# Altium PCB PCB1.PcbDoc (part 2 of 3)
Units mm, origin at the board's own origin, x right, y up, seen from the top; angles counter-clockwise.
Board outline 72 x 48 mm, 6 copper layers (SIG1, GND1, SIG2, PWR, GND2, SIG3), stack 0.816 mm thick; 134 components, 203 nets, 720 pads, 397 vias.
Unrouted connection lines stored in the file: 1.
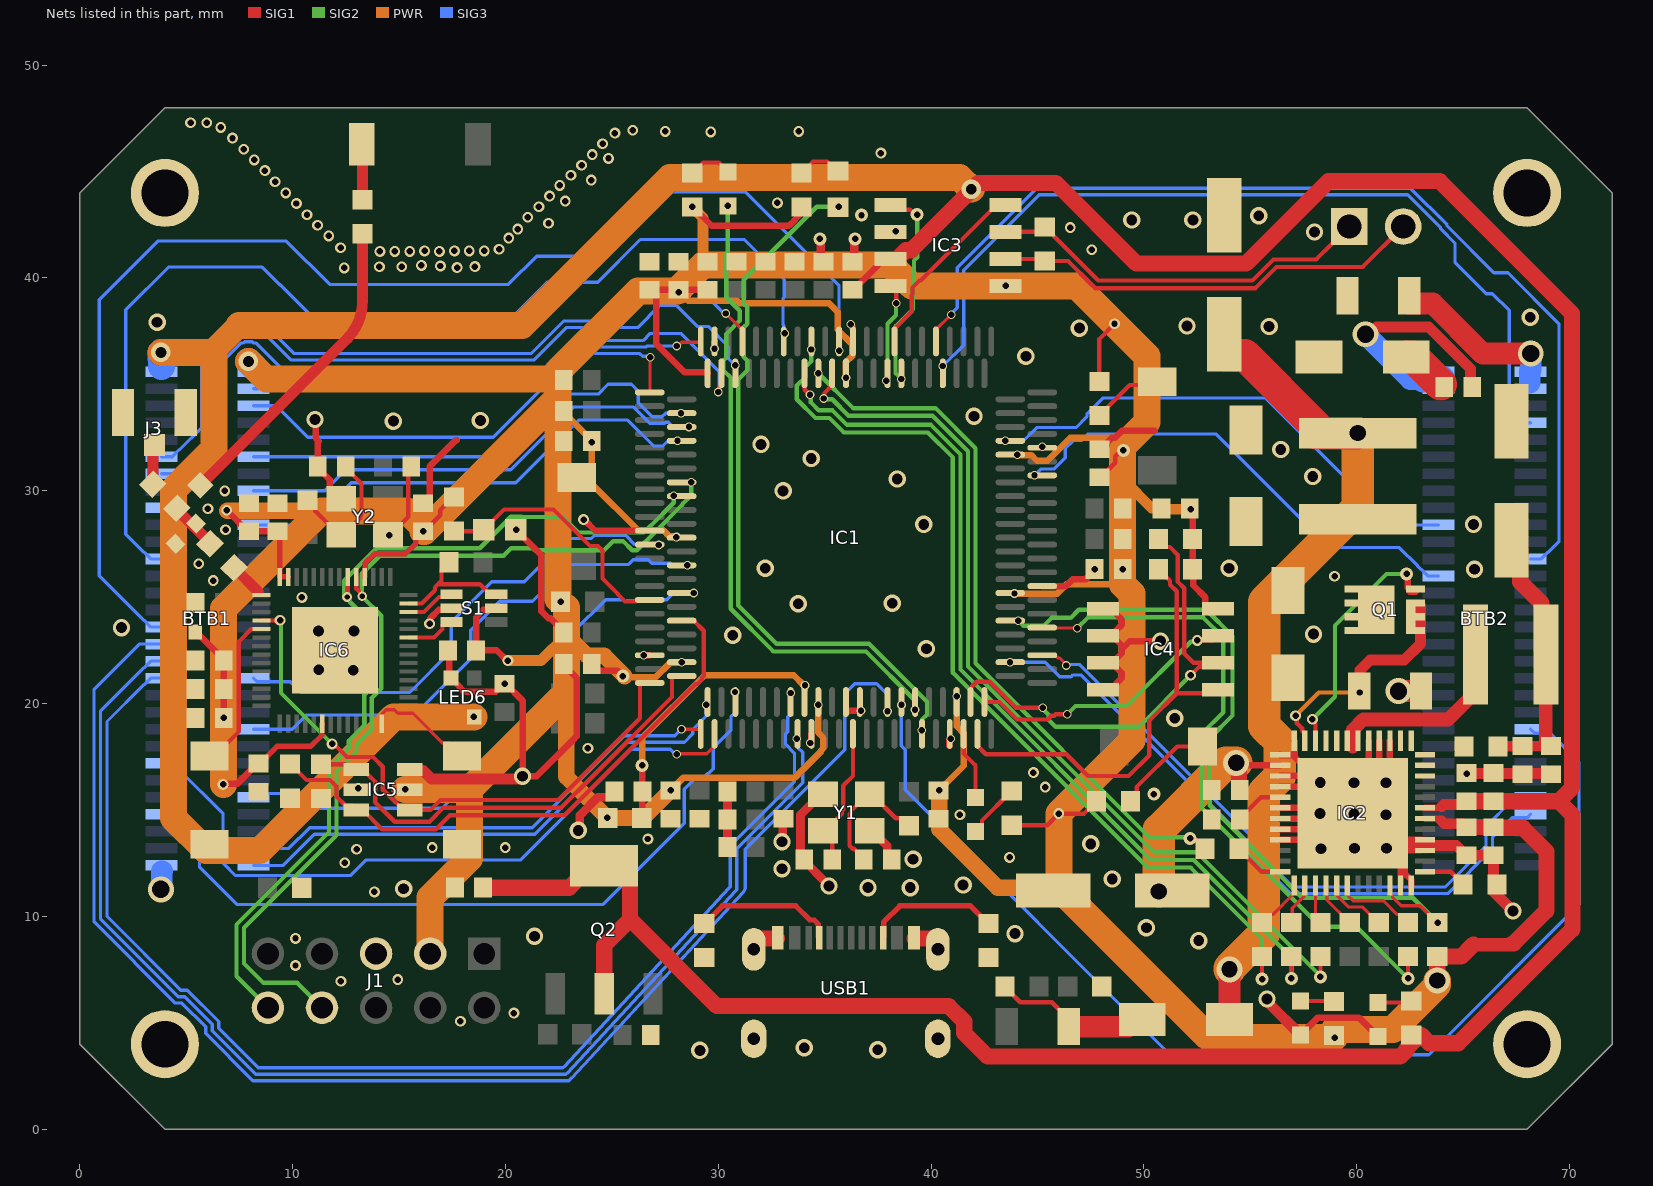
[diagram p6: the nets of this part, all layers, seen from the top]

## Via types
v1: diameter 0.406, hole 0.3, SIG1 to SIG3, 155 vias
v2: diameter 0.508, hole 0.305, SIG1 to SIG3, 119 vias
v3: diameter 0.813, hole 0.508, SIG1 to SIG3, 58 vias
v4: diameter 0.61, hole 0.305, SIG1 to SIG3, 33 vias
v5: diameter 0.914, hole 0.508, SIG1 to SIG3, 13 vias
v6: diameter 1.219, hole 0.813, SIG1 to SIG3, 5 vias
v7: diameter 1.219, hole 0.762, SIG1 to SIG3, 5 vias
v8: diameter 0.457, hole 0.254, SIG1 to SIG3, 4 vias
v9: diameter 1.2, hole 1.2, SIG1 to SIG3, 2 vias
v10: diameter 0.8, hole 0.8, SIG1 to SIG3, 2 vias
v11: diameter 0.508, hole 0.3, SIG1 to SIG3, 1 vias

## Nets (pads, with @x,y where several pads share a name; then routed paths per layer and width w, separated by ;. In a path a pad name is that pad's centre, name@x,y a point inside that pad or via, vN(x,y) a via of type N, cw(c..) or ccw(c..) an arc to the next point about the centre after c; other vN are vias at no path point) (continued)
3.3V_MCU: BTB1.30 C13.2 C14.2 C20.2 C21.2 C22.2 C23.2 C24.2 C25.2 C26.2 C27.2 C28.2 C29.2 C43.2 C44.1 C45.1 C48.2 C50.2 C51.2 C52.2 C54.2 IC1.18 IC1.38 IC1.57 IC1.77 IC1.108 IC1.128 IC1.151 IC1.169 IC2.30 IC3.5 IC4.8 IC5.5 IC6.20 IC6.46 IC6.55 IC6.56 J1.3 L3.1 R5.2 R9.1 R10.1 R18.1 R21.2 R22.2 R23.2 R24.2 R25.2 R26.2 R29.2 R30.2 S1.5 | length 317.9
  SIG1 w0.203: v2(16.129,28.094) 16.184,28.094 16.939,28.85 16.939,29.094 17.552,29.707 R10.1@17.577,29.707 ; R25.2@43.79,14.289 45.453,14.289 v2(45.999,14.835) 47.181,14.835 47.391,15.046 47.416,15.046 47.765,15.394 R22.2@47.765,15.419 ; C25.2@47.904,30.634 47.959,30.634 48.648,31.323 48.648,31.623 48.652,31.623 48.928,31.899 v4(49.038,31.899) ; R24.2@47.904,35.142 47.904,37.136 v2(48.616,37.847)
  SIG1 w0.254: C54.2@8.407,17.187 8.462,17.187 9.271,17.995 10.848,17.995 11.368,18.515 11.368,19.035 IC6.20@11.389,19.056 ; C44.1@9.296,28.094 9.389,28.002 IC6.56@9.389,25.956 IC6.55@9.789,25.956 ; IC6.46@13.389,25.956 13.389,26.233 13.409,26.254 13.409,26.599 13.86,27.05 15.302,27.05 15.786,27.535 15.786,27.806 C45.1@16.074,28.094
  SIG1 w0.305: L3.1@5.421,23.369 5.421,23.344 5.594,23.172 5.675,23.172 6.756,22.091 C52.2@6.756,22.036 C51.2@6.756,20.683 v2(6.756,19.331) ; v2(6.731,16.207) 6.77,16.245 7.411,16.245 8.352,17.187 C54.2@8.407,17.187 ; v2(6.902,29.084) 6.905,29.084 7.895,28.094 C43.2@7.95,28.094 C44.1@9.296,28.094 ; C45.1@16.074,28.094 v2(16.129,28.094) ; S1.5@19.567,24.487 19.494,24.414 18.963,24.414 18.618,24.069 C48.2@18.618,22.506 19.594,22.506 20.076,22.023 v2(20.117,22.023) ; C29.2@24.053,21.867 24.053,21.816 24.316,21.553 25.254,21.553 v4(25.515,21.292) ; C27.2@26.772,39.446 C27.2@26.827,39.446 ; v2(28.143,39.323) 28.143,39.435 C21.2@28.132,39.446 ; v2(28.775,43.337) R21.2@28.778,43.337 28.803,43.337 29.69,42.45 33.321,42.45 33.586,42.716 33.586,42.741 33.884,43.038 R23.2@33.909,43.038 ; C26.2@29.493,39.446 C21.2@28.132,39.446 ; IC1.128@29.5,35.52 29.5,35.549 29.488,35.561 28.423,35.561 27.089,36.895 27.089,39.184 C27.2@26.827,39.446 ; IC1.38@41.188,20.628 41.188,20.358 v1(41.199,20.347) ; v2(48.996,26.316) C24.2@48.996,26.519 ; C20.2@52.294,28.957 52.294,26.316 52.31,26.299 52.31,25.562 52.887,24.986 52.887,24.634 53.059,24.462 IC4.8@53.475,24.462 ; IC2.30@63.207,14.604 63.983,14.604 ; C27.2@26.827,39.446 C21.2@28.132,39.446
  SIG1 w0.508: 63.983,14.502 64.125,14.361 64.99,14.361 C13.2@65.151,14.2
  SIG1 w0.635: 65.483,8.688 65.494,8.678 67.266,8.678 67.324,8.735
  SIG1 w0.762: v7(63.779,6.986) R18.1@63.779,8.117 64.912,8.117 65.483,8.688 ; C13.2@65.151,14.2 C14.2@66.421,14.2 66.455,14.166 67.802,14.166 68.91,13.057 68.91,10.275 67.371,8.735 67.324,8.735
  PWR w0.305: 22.897,33.518 v4@24.054,32.361 ; v4@24.058,32.357 24.058,30.325 26.238,28.145 27.421,28.145 27.709,27.857 28.004,27.857 v1(28.033,27.827) ; v4@25.597,21.292 25.642,21.248 27.066,21.248 27.749,21.931 28.261,21.931 v1(28.28,21.95) ; v4(27.762,15.927) 28.343,16.508 33.576,16.508 34.844,17.777 34.844,17.813 34.932,17.9 34.932,18.405 34.692,18.646 v1(34.692,19.94) ; v2@28.198,39.323 28.581,38.94 30.872,38.94 30.999,38.813 35.203,38.813 35.611,38.405 35.611,37.571 36.285,36.897 36.285,36.329 35.992,36.036 35.992,35.318 v1(36.002,35.307) ; v4(40.386,15.927) 41.537,17.079 41.537,18.601 41.199,18.94 v1(41.199,20.347) ; v1(43.915,25.174) 45.926,25.174 46.356,25.605 48.996,25.605 ; v1(44.044,31.701) 44.063,31.681 44.702,31.681 44.965,31.417 45.472,31.417 46.543,32.488 48.489,32.488 v4@48.946,32.031
  PWR w0.508: v2(20.117,22.023) 21.674,22.023 22.86,23.209 ; v2(28.775,43.337) 29.286,42.826 29.286,40.616 29.286,40.524 ; v4(49.038,31.899) 49.038,30.517 50.368,29.186 50.927,29.186 50.978,29.135 v2(52.197,29.135)
  PWR w0.762: v2@6.927,29.059 11.354,29.059 ; 22.86,20.525 22.86,16.562 v4(24.79,14.632) 26.467,14.632 v4(27.762,15.927) ; 22.885,23.209 23.844,22.251 24.639,22.251 v4@25.597,21.292 ; v4(40.386,15.927) 40.386,14.098 43.129,11.355 45.999,11.355
  PWR w1.27: v2@6.756,16.207 v2(6.756,19.331) 6.756,24.461 11.354,29.059 15.385,29.059 16.129,28.315 v2(16.129,28.094) 16.197,28.094 22.479,34.376 ; v5(7.923,36.081) 8.747,35.257 22.479,35.257 22.479,34.376 ; v2(15.291,15.978) 18.313,15.978 ; J1.3@16.459,8.256 16.459,10.882 18.313,12.737 18.313,15.978 ; v2@22.479,24.919 22.479,34.376 ; 22.479,35.638 26.222,39.381 v2@28.085,39.381 ; 22.86,24.525 22.86,23.209 22.86,20.525 18.313,15.978 ; v2@28.143,39.422 28.143,39.473 29.286,40.616 38.1,40.616 39.09,39.625 v2(43.51,39.625) 46.838,39.625 v2(48.616,37.847) 50.14,36.323 50.14,33.225 v4@49.038,32.123 ; v4@48.996,31.899 v2(48.996,26.316) 48.996,25.605 49.428,25.172 49.428,18.264 v2(45.999,14.835) 45.999,11.355 53.047,4.308 v2(58.953,4.308) ; 58.953,4.7 61.708,4.7 63.779,6.771 v7(63.779,6.986)
  SIG3 w1.27: v5(7.923,36.081) 7.923,36.075 BTB1.30@8.16,35.837
  other v2: 22.593,24.792
  other v4: 24.054,32.294
5V_Com: BTB1.31 C10.1 C11.1 C17.1 C19.1 IC2.31 IC3.3 LED6.4 Q2.2 Q2.4 R28.2 | length 223.1
  SIG1 w0.305: C19.1@36.297,39.446 36.352,39.446 37.495,40.589 37.495,40.723 37.667,40.895 IC3.3@38.092,40.895 ; IC2.31@63.207,15.104 63.994,15.104
  SIG1 w0.508: 63.994,15.162 64.09,15.259 64.99,15.259 C10.1@65.151,15.42
  SIG1 w0.762: C17.1@18.948,11.355 22.994,11.355 24.013,12.374 Q2.4@24.638,12.374 25.263,12.374 25.857,11.78 25.857,9.867 ; Q2.2@24.638,6.374 24.638,8.648 25.857,9.867 ; IC3.3@38.461,40.951 38.817,41.307 39.063,41.307 v5@41.855,44.099 ; v5@41.914,44.201 41.955,44.201 42.221,44.468 45.856,44.468 49.648,40.675 54.793,40.675 58.67,44.553 63.892,44.553 70.117,38.329 70.117,16.054 69.483,15.42 ; C10.1@65.151,15.42 C11.1@66.421,15.42 69.483,15.42 ; 25.857,9.867 29.933,5.791 40.828,5.791 41.552,5.067 41.552,4.523 42.655,3.419 62.042,3.419 62.36,3.737 62.36,3.827 62.967,4.434 63.017,4.434 63.411,4.04 64.77,4.04 70.129,9.399 70.129,14.773 69.483,15.42
  PWR w1.143: 6.296,36.501 6.296,36.591 7.476,37.771
  PWR w1.27: v5(3.81,36.501) 6.296,36.501 6.296,31.939 4.394,30.037 4.394,14.632 5.926,13.1 8.465,13.1 14.746,19.382 v4(18.517,19.382) ; 7.476,37.771 20.777,37.771 27.731,44.725 41.332,44.725 v5(41.885,44.172)
  SIG3 w1.27: v5(3.81,36.501) 3.81,36.222 3.84,36.192 BTB1.31@3.84,35.837
5V_IN: D2.2 F2.2 R3.1 | length 7.6
  SIG1 w0.203: R3.1@43.472,6.707 43.472,6.682 44.187,5.967 45.669,5.967 46.442,5.194 F2.2@46.442,4.789
  SIG1 w1.016: F2.2@46.459,4.827 49.263,4.827 49.593,5.158 D2.2@49.918,5.158
6V_BUCK: C1.1 C2.2 C3.2 L1.2 R6.2 | length 12.9
  SIG1 w0.508: R6.2@66.637,17.985 66.649,17.997 C2.2@69.071,17.997
  SIG1 w0.635: L1.2@68.889,22.303 68.889,18.179 69.071,17.997 C2.2@69.101,17.997
  SIG1 w0.762: C1.1@67.259,27.675 67.678,27.256 67.678,25.719 68.68,24.717 68.68,22.512 L1.2@68.889,22.303
ADC1_PTA11: IC1.160 R10.2 RT1.1 | length 12.2
  SIG1 w0.203: R10.2@17.577,28.107 18.922,28.107 RT1.1@18.986,28.17 19.936,29.121 22.259,29.121 23.974,27.405 24.348,27.405 24.562,27.191 24.562,25.885 25.291,25.156 25.291,25.128 25.618,24.8 26.125,24.8 26.199,24.875 IC1.160@26.78,24.875
CAN0_RX_PTA6: IC1.102 IC3.4 | length 5.3
  SIG1 w0.203: v1(37.897,35.175) 37.95,35.228 IC1.102@37.95,35.52 ; IC3.4@38.092,39.625 38.204,39.625 38.427,39.402 38.354,39.402 v1(38.354,38.817)
  SIG2 w0.203: v1(37.897,35.175) 37.936,35.214 37.936,35.357 37.952,35.373 37.952,37.853 38.352,38.253 38.352,38.815 v1(38.354,38.817)
CAN0_STB: IC1.101 IC3.8 | length 8.9
  SIG1 w0.203: IC1.101@38.275,37.02 38.29,37.035 38.29,37.615 38.329,37.654 38.329,37.657 39.091,38.419 39.091,39.189 39.126,39.225 39.126,39.552 39.454,39.88 39.512,39.88 43.067,43.435 IC3.8@43.492,43.435
CAN0_TX_PTA7: IC1.100 IC3.1 | length 10
  SIG1 w0.203: IC3.1@38.092,43.435 38.316,43.212 39.001,43.212 39.235,42.978 v4(39.345,42.978) ; IC1.100@38.6,35.52 38.6,35.341 38.602,35.339 v1(38.602,35.257)
  SIG2 w0.203: v1(38.602,35.257) 38.329,35.53 38.329,37.726 39.129,38.526 39.129,39.525 39.192,39.588 39.192,40.818 39.345,40.97 v4(39.345,42.978)
CAN_H: IC3.7 J2.1 R31.2 | length 18.4
  SIG1 w0.203: IC3.7@43.492,42.165 45.109,42.165 R31.2@45.339,42.395 45.364,42.395 45.712,42.047 45.712,42.022 47.855,39.879 55.093,39.879 56.083,40.87 58.09,40.87 58.878,41.658 J2.1@59.639,42.419
CAN_L: IC3.6 J2.2 R31.1 | length 20.5
  SIG1 w0.203: IC3.6@43.492,40.895 45.239,40.895 R31.1@45.339,40.795 46.436,40.795 47.547,39.685 47.708,39.524 55.24,39.524 56.23,40.514 60.274,40.514 J2.2@62.179,42.419
CC1: R32.1 USB1.4 | length 6.6
  SIG1 w0.254: R32.1@29.337,9.666 29.362,9.666 30.193,10.497 33.64,10.497 34.302,9.835 34.508,9.835 34.694,9.649 USB1.4@34.694,9.054
CC2: R36.1 USB1.10 | length 6.3
  SIG1 w0.254: USB1.10@37.742,9.006 37.765,9.029 37.765,9.733 38.529,10.497 41.841,10.497 42.672,9.666 R36.1@42.697,9.666
DIO_I: IC6.40 S1.1 | length 2.4
  SIG1 w0.203: IC6.40@15.439,24.306 16.169,24.306 16.876,25.014 17.343,25.014 S1.1@17.467,25.137
DIO_O: IC6.37 S1.3 | length 2.5
  SIG1 w0.203: IC6.37@15.439,23.106 16.645,23.106 17.043,23.504 17.043,23.714 17.167,23.837 S1.3@17.467,23.837
DIO_Select: IC6.41 R37.1 S1.6 | length 6
  SIG1 w0.203: IC6.41@15.439,24.706 15.44,24.707 16.063,24.707 16.688,25.332 16.688,25.467 16.836,25.616 ; R37.1@17.342,26.646 16.994,26.298 16.994,25.774 16.836,25.616 ; S1.6@19.567,25.137 19.267,25.137 18.788,25.616 16.836,25.616
EEPROM_WP_PTB18: IC1.42 IC4.7 | length 12.9
  SIG1 w0.203: IC1.42@42.5,20.08 43.209,20.08 44.034,19.255 45.476,19.255 45.65,19.429 45.78,19.429 45.846,19.496 v1(46.389,19.496) ; v2(52.502,22.968) 53.251,22.968 IC4.7@53.475,23.192
  SIG2 w0.203: v1(46.389,19.496) 46.787,19.894 49.178,19.894 52.195,22.91 52.444,22.91 v2(52.502,22.968)
ESP32S3_EN: IC1.172 IC5.4 IC6.4 | length 28
  SIG1 w0.203: IC6.4@8.539,23.906 IC6.4@8.539,23.906 9.16,23.904 9.173,23.892 9.388,23.892 v11(9.414,23.917) ; v2(11.855,18.107) 11.937,18.107 12.549,17.495 13.773,17.495 14.23,17.038 14.23,15.962 14.794,15.399 14.803,15.399 15.199,15.003 16.48,15.003 16.947,15.47 22.477,15.47 26.322,19.315 26.322,20.94 26.357,20.975 IC1.172@26.78,20.975
  SIG2 w0.203: v11(9.414,23.917) 9.456,23.875 9.456,20.506 v2(11.855,18.107)
ESP32S3_EN_RESET: IC1.171 IC5.1 R35.2 | length 22
  SIG1 w0.203: R35.2@11.328,17.152 12.45,17.152 12.699,16.903 IC5.1@12.999,16.903 13.299,16.903 13.695,16.507 13.705,16.507 13.875,16.336 13.875,15.368 14.794,14.449 16.428,14.449 17.094,15.114 22.624,15.114 24.096,16.587 27.822,20.312 27.822,21.265 27.857,21.3 IC1.171@28.28,21.3
ESP32S3_EN_SET: IC1.163 IC5.3 R34.2 | length 27.2
  SIG1 w0.203: R34.2@9.881,17.159 9.906,17.159 10.65,16.415 11.75,16.415 12.057,16.107 12.057,15.635 12.492,15.201 12.801,15.201 IC5.3@12.999,15.003 13.299,15.003 14.209,14.093 16.722,14.093 17.387,14.759 22.771,14.759 24.452,16.439 28.919,20.906 29.003,20.906 29.234,21.137 29.234,21.221 29.312,21.299 29.312,23.428 28.838,23.902 IC1.163@28.473,23.902
EXTAL: C16.2 IC1.23 Y1.3 | length 6.7
  SIG1 w0.203: C16.2@35.357,12.676 35.357,13.596 Y1.3@34.917,14.036 35.017,14.036 35.808,14.826 35.808,14.962 35.871,15.026 35.871,16.149 36.325,16.603 IC1.23@36.325,18.58
GLVMS-: BTB2.29 BTB2.30 F1.2 | length 8.4
  SIG1 w1.016: F1.2@62.461,39.168 62.461,38.818 62.478,38.801 63.564,38.801 65.915,36.45 v6(68.174,36.45)
  SIG3 w0.762: BTB2.30@68.129,35.631 BTB2.30@68.16,35.6
  SIG3 w1.016: 68.123,35.079 BTB2.30@68.123,35.55 ; BTB2.30@68.129,35.631 68.167,35.669 68.167,36.444 v6(68.174,36.45)
GND: BTB1.60 BTB2.31 BTB2.32 C1.2 C2.1 C3.1 C4.1 C5.2 C6.2 C7.2 C8.1 C9.1 C10.2 C11.2 C12.1 C13.1 C14.1 C15.2 C16.1 C17.2 C18.1 C19.2 C20.1 C21.1 C22.1 C23.1 C24.1 C25.1 C26.1 C27.1 C28.1 C29.1 C30.1 C31.1 C32.1 C33.1 C34.1 C35.1 C36.1 C37.1 C38.1 C39.1 C40.1 C41.1 C42.1 C43.1 C44.2 C45.2 C46.2 C47.1 C48.1 C49.1 C50.1 C51.1 C52.1 C53.1 C54.1 D4.1 IC1.17 IC1.22 IC1.24 IC1.37 IC1.58 IC1.78 IC1.107 IC1.127 IC1.150 IC1.168 IC2.1 IC2.3 IC2.4 IC2.6 IC2.7 IC2.8 IC2.9 IC2.23 IC2.24 IC2.27 IC2.28 IC2.39 IC2.40 IC2.41 IC2.48 IC2.49 IC3.2 IC4.1 IC4.2 IC4.3 IC4.4 IC5.2 IC5.6 IC6.57 J1.5 J3.1 J3.3 L4.1 LED4.1 LED5.1 LED6.2 pad.1 pad.2 pad.3 pad.4 R4.2 R7.1 R8.1 R14.2 R32.2 R34.1 R35.1 R36.2 RT1.2 S1.2 SW1.1 SW4.2 SW5.2 USB1.1 USB1.12 USB1.13 USB1.14 Y1.2 Y1.4 Y2.2 Y2.4 | length 139.8
  SIG1 w0.203: v2(14.536,27.916) 14.572,27.916 15.44,28.784 15.44,30.957 C47.1@15.57,31.087
  SIG1 w0.305: v3(11.049,33.352) 11.075,33.326 11.075,32.488 11.227,32.336 11.176,32.285 C46.2@11.176,31.249 ; C46.2@11.176,31.142 11.176,31.087 11.738,30.525 11.738,30.077 12.186,29.63 Y2.4@12.286,29.63 ; C45.2@16.129,29.414 16.171,29.414 16.434,29.677 16.434,31.142 17.678,32.386 17.704,32.386 ; v2(16.434,23.757) 16.472,23.796 16.472,24.024 16.863,24.414 17.394,24.414 S1.2@17.467,24.487 ; C48.1@17.298,22.506 17.365,22.438 17.365,21.279 17.846,20.798 17.846,20.767 18.057,20.556 19.535,20.556 19.909,20.931 20.019,20.931 20.803,20.147 v3(20.803,16.588) 21.46,16.588 23.17,18.297 23.348,18.476 23.348,21.201 22.733,21.816 C29.1@22.733,21.871 ; RT1.2@20.486,28.17 21.417,27.239 21.688,26.968 21.688,24.341 22.017,24.012 22.12,24.012 22.733,23.399 C4.1@22.733,23.344 ; RT1.2@20.501,28.155 20.501,28.164 v2(20.504,28.168) ; v2(23.673,28.653) 23.695,28.653 24.223,28.125 IC1.150@26.232,28.125 ; v1(26.492,22.273) 26.564,22.273 26.566,22.275 IC1.168@26.78,22.275 ; v1(29.82,36.679) 29.82,37.015 IC1.127@29.825,37.02 ; v1(34.322,18.153) 34.337,18.153 34.375,18.191 IC1.17@34.375,18.58 ; IC1.22@36,20.08 36,19.684 36.012,19.672 v1(36.703,19.672) ; v1(36.22,37.824) 36.22,37.796 36.327,37.689 IC1.107@36.327,37.582 ; IC1.37@40.863,18.032 40.863,18.283 v1(40.928,18.349) ; v1(45.218,32.065) 45.218,32.027 IC1.78@45.22,32.025 ; IC1.58@45.22,25.525 46.332,25.525 46.647,25.839 47.255,25.839 47.676,26.261 v2(47.676,26.316) ; C25.1@47.904,31.954 47.959,31.954 48.488,32.483 48.632,32.483 48.968,32.818 50.495,32.818 ; IC4.4@48.075,20.652 48.5,20.652 48.672,20.824 48.672,20.922 48.949,21.199 48.949,21.451 48.672,21.728 48.672,21.749 IC4.3@48.5,21.922 ; IC4.3@48.075,21.922 IC4.3@48.5,21.922 ; IC4.2@48.075,23.192 IC4.2@48.5,23.192 ; IC4.1@48.075,24.462 48.5,24.462 48.672,24.289 48.672,24.228 48.949,23.951 48.949,23.699 48.672,23.422 48.672,23.364 IC4.2@48.5,23.192 ; v3(50.775,22.938) 49.331,22.938 48.95,22.557 ; IC2.9@56.407,13.604 57.359,13.604 58.268,14.512 v5(58.268,14.835) ; IC2.8@56.407,14.104 57.536,14.104 IC2.49@58.036,14.604 ; IC2.7@56.407,14.604 IC2.49@58.036,14.604 ; IC2.6@56.407,15.104 57.999,15.104 v5(58.268,14.835) ; IC2.4@56.407,16.104 58.096,16.104 v5(58.283,16.291) ; IC2.3@56.407,16.604 57.97,16.604 v5(58.283,16.291) ; IC2.1@56.407,17.604 56.434,17.576 56.997,17.576 57.272,17.301 57.359,17.301 58.283,16.378 v5(58.283,16.291) ; IC2.48@57.057,18.254 57.084,18.226 57.084,17.576 ; LED4.1@57.353,4.434 58.173,5.254 60.099,5.254 LED5.1@60.995,4.358 ; IC2.41@60.557,18.254 60.557,16.971 v5(59.868,16.282) 60.037,16.282 61.057,17.301 IC2.40@61.057,18.254 ; v5(61.369,16.282) 61.557,16.47 IC2.39@61.557,18.254 ; IC2.23@62.057,11.454 IC2.49@62.057,12.544 ; IC2.24@62.557,11.454 62.557,11.723 62.255,12.025 62.255,12.406 IC2.49@61.557,13.104 ; IC2.27@63.207,13.104 IC2.49@61.557,13.104 ; IC2.28@63.207,13.604 61.786,13.604 v5(61.392,13.209) 61.498,13.104 IC2.49@61.557,13.104 ; IC4.3@48.5,21.922 48.95,22.372 48.95,22.557 ; IC4.2@48.5,23.192 48.95,22.741 48.95,22.557 ; IC2.49@58.036,14.604 v5(58.268,14.835)
  SIG1 w0.406: v3(23.419,14.048) 23.497,14.125 23.497,14.753 24.341,15.597 24.909,15.597 25.121,15.809 C5.2@25.121,15.864 ; C32.1@30.43,13.26 C31.1@30.43,14.556 C30.1@30.43,15.864 ; v3(32.995,13.514) 33.033,13.552 33.033,14.561 C42.1@33.071,14.599 ; v4(34.773,41.835) 34.811,41.796 34.811,40.891 C36.1@34.936,40.766 ; Y1.2@34.917,15.736 34.817,15.736 34.133,15.052 34.13,15.052 33.862,14.783 33.862,12.851 C16.1@34.037,12.676 34.037,12.621 34.586,12.072 34.586,12.059 35.204,11.441 v3(35.204,11.431) ; C19.2@36.297,40.766 36.385,40.854 36.385,41.796 v4(36.424,41.835) ; Y1.4@37.117,14.036 37.217,14.036 37.939,13.314 37.939,12.888 C15.2@38.15,12.676
  SIG1 w0.508: IC5.6@15.499,16.903 15.545,16.857 16.129,16.857 16.522,16.464 20.596,16.464 20.72,16.588 v3(20.803,16.588) ; v3(55.778,6.123) 55.837,6.064 55.837,5.951 LED4.1@57.353,4.434 ; v6(60.409,37.357) 60.601,37.357 60.939,37.695 63.377,37.695 65.34,35.732 65.34,34.966 C8.1@65.43,34.876 ; 62.509,13.336 64.675,13.336 65.132,12.88 C13.1@65.151,12.88 C14.1@66.421,12.88 66.421,11.177 v3(67.335,10.263) ; v4(65.176,16.715) 69.088,16.715 C2.1@69.113,16.69
  SIG1 w0.762: USB1.13@31.667,8.456 31.667,8.809 31.823,8.965 USB1.1@32.751,8.965 ; USB1.12@39.232,8.965 40.161,8.965 40.317,8.809 USB1.14@40.317,8.456
  SIG1 w1.016: v6(61.96,20.589) 61.966,20.595 63.003,20.595 63.013,20.584 R8.1@63.013,20.448
  SIG3 w1.016: v6(3.81,11.279) 3.849,11.318 3.849,12.105 3.861,12.117 ; v6(60.409,37.357) 62.509,35.257 63.144,35.257
  SIG3 w1.27: 63.144,35.257 63.983,35.257
  other v2: 17.882,5.081 20.396,5.462 12.268,6.961 14.935,7.037 10.135,7.698 10.135,8.968 13.843,11.152 12.446,12.524 43.688,12.778 13.005,13.159 16.561,13.235 19.99,13.235 26.695,13.641 41.351,14.784 13.081,16.029 45.364,16.08 44.806,16.765 23.876,17.908 19.964,20.931 10.439,24.995 6.274,25.782 58.953,25.986 5.588,26.57 6.848,28.174 6.02,29.161 6.807,29.999 12.425,40.475 17.729,40.488 14.075,40.525 15.125,40.525 18.567,40.538 16.942,40.564 16.053,40.589 14.1,41.25 14.8,41.25 15.5,41.25 16.9,41.25 16.2,41.275 17.6,41.275 18.3,41.275 19,41.275 47.549,41.327 19.7,41.35 12.25,41.425 20.15,41.875 11.7,41.975 20.575,42.3 46.533,42.369 11.175,42.475 22.022,42.57 21.05,42.85 10.675,42.975 21.575,43.35 10.175,43.5 32.775,43.525 22.809,43.612 22.075,43.85 9.675,44 22.55,44.35 9.175,44.525 24.028,44.602 23.075,44.825 8.7,45.05 23.575,45.3 8.2,45.55 24.841,45.618 24.075,45.8 37.643,45.868 7.7,46.05 24.562,46.304 7.175,46.575 25.146,46.812 29.642,46.863 27.508,46.888 33.782,46.888 25.984,46.939 6.625,47.075 5.207,47.298 5.969,47.298
  other v3: 29.134,3.71 37.49,3.735 34.036,3.837 52.578,8.866 21.361,9.069 43.942,9.196 50.114,9.476 15.215,11.304 37.033,11.355 39.014,11.355 41.504,11.482 48.514,11.762 32.995,12.244 39.154,12.689 47.498,13.413 51.448,19.319 12.852,21.566 11.227,21.591 39.776,22.582 30.683,23.217 57.963,23.268 11.209,23.413 12.878,23.42 1.956,23.573 33.757,24.69 38.176,24.716 65.532,26.316 32.207,26.367 54,26.367 39.649,28.424 65.481,28.424 33.045,29.999 38.405,30.558 57.926,30.673 34.366,31.523 56.426,31.942 32.004,32.183 14.732,33.275 18.821,33.301 42.012,33.504 44.45,36.323 46.965,37.644 55.88,37.72 52.019,37.746 3.632,37.924 68.149,38.153 58.014,42.165 49.428,42.724 52.299,42.724 55.397,42.927
  other v4: 50.47,15.749 38.329,42.191 36.728,42.953
  other v5: 58.318,13.184 59.893,13.209 61.366,14.784 59.868,14.81
INT_TLF35584_PTD6: IC1.52 R20.1 | length 31.5
  SIG1 w0.152: IC1.52@45.22,23.575 45.234,23.561 46.849,23.561 v1(46.862,23.549)
  SIG1 w0.203: v4(62.408,7.088) R20.1@62.408,8.041
  SIG2 w0.203: v1(46.862,23.549) 46.864,23.549 47.371,24.055 52.78,24.055 53.731,23.105 53.731,19.593 52.732,18.594 52.732,15.082 55.711,12.103 58.3,9.514 59.981,9.514 v4(62.408,7.088)
KEY_GPIO0: IC6.5 SW4.1 | length 7.4
  SIG1 w0.203: SW4.1@6.096,17.545 6.321,17.545 7.474,18.698 7.474,22.925 8.053,23.504 8.537,23.504 IC6.5@8.539,23.506
KEY_GPIO21: IC6.27 SW5.1 | length 5.2
  SIG1 w0.152: IC6.27@14.189,19.056 14.213,19.08 14.213,19.528 14.397,19.712 14.785,19.712 14.946,19.55 15.656,19.55 17.062,18.144 17.359,18.144 SW5.1@17.958,17.545
  SIG1 w0.203: IC6.27@14.189,19.056 IC6.27@14.19,19.054
LED_PTA29: IC1.32 LED1.1 | length 30.9
  SIG1 w0.203: v1(39.243,19.712) 39.25,19.719 IC1.32@39.25,20.08
  SIG2 w0.203: v2(30.45,43.4) 30.45,41.2 30.375,41.125 30.375,39.096 31.01,38.461 31.01,37.998 30.378,37.366 30.378,36.258 30.243,36.123 30.243,35.66 30.582,35.322 30.582,24.462 32.588,22.455 36.937,22.455 39.204,20.188 39.204,19.751 v1(39.243,19.712)
LED_PTA30: IC1.33 LED2.1 | length 33.9
  SIG1 w0.203: v1(39.559,18.748) 39.559,18.596 IC1.33@39.575,18.58
  SIG2 w0.203: v2(35.65,43.35) 34.628,43.35 31.197,39.92 31.197,38.776 31.366,38.608 31.366,37.85 31.197,37.682 31.197,36.286 31.361,36.123 31.361,35.66 30.937,35.237 30.937,24.609 32.735,22.811 37.084,22.811 39.802,20.093 39.802,19.48 39.577,19.256 39.577,18.767 v1(39.559,18.748)
LED_PTA31: IC1.39 LED3.1 | length 3.2
  SIG1 w0.203: IC1.39@41.525,18.58 41.525,17.661 42.087,17.099 LED3.1@42.088,15.584
LNA: IC6.1 R39.1 | length 1.8
  SIG1 w0.203: R39.1@7.271,26.385 R39.1@7.271,26.411 ; 8.376,25.268 IC6.1@8.539,25.106
  SIG1 w0.508: R39.1@7.246,26.385 7.259,26.385 8.376,25.268
LPI2C0_SCL_EEPROM: IC1.40 IC4.6 R29.1 | length 22.3
  SIG1 w0.203: IC1.40@41.85,20.08 41.865,20.095 41.865,20.759 42.14,21.034 42.758,21.034 43.979,19.813 v1(45.237,19.813) ; R29.1@50.686,27.713 51.034,27.365 51.218,27.365 51.582,27.001 51.582,25.736 51.892,25.425 51.892,22.353 52.324,21.922 53.05,21.922 IC4.6@52.854,21.726 ; v2(52.191,21.331) 52.586,21.726 IC4.6@52.854,21.726 ; IC4.6@53.475,21.922 53.279,21.726 IC4.6@52.854,21.726
  SIG2 w0.203: v1(45.237,19.813) 45.237,19.758 45.527,19.469 45.527,19.236 45.854,18.909 49.769,18.909 v2(52.191,21.331)
LPI2C0_SDA_EEPROM: IC1.41 IC4.5 R30.1 | length 21.3
  SIG1 w0.203: IC1.41@42.175,18.58 42.175,18.02 42.569,17.626 46.358,17.626 47.382,16.602 49.277,16.602 50.254,17.579 50.254,19.204 51.537,20.487 ; R30.1@50.686,26.316 50.686,26.291 51.034,25.942 51.059,25.942 51.226,25.775 51.226,25.588 51.537,25.278 51.537,20.487 ; IC4.5@53.475,20.652 53.31,20.487 51.537,20.487
LPSPI1_SCL: IC1.114 R15.1 | length 42.7
  SIG1 w0.203: IC1.114@34.05,35.52 34.065,35.505 34.065,34.752 v1(34.31,34.508) ; v4(56.921,7.088) R15.1@56.921,8.041
  SIG2 w0.203: v1(34.31,34.508) 34.349,34.469 34.349,34.146 34.716,33.779 35.367,33.779 36.048,33.098 39.99,33.098 41.377,31.711 41.377,21.602 50.322,12.656 52.338,12.656 56.921,8.073 v4(56.921,7.088)
LPSPI1_SCS: IC1.110 R16.1 | length 42.8
  SIG1 w0.203: v1(34.948,34.338) 34.987,34.376 34.987,34.597 35.325,34.935 35.325,35.495 IC1.110@35.35,35.52 ; v4(58.293,7.164) R16.1@58.293,8.041
  SIG2 w0.203: v1(34.948,34.338) 34.987,34.299 35.35,34.299 36.119,33.529 40.061,33.529 41.732,31.858 41.732,21.749 50.469,13.012 52.486,13.012 58.293,7.205 v4(58.293,7.164)
LPSPI1_SDI: IC1.112 R12.1 | length 33.4
  SIG1 w0.203: v4(52.166,13.672) 52.276,13.672 52.391,13.557 52.522,13.557 52.87,13.209 R12.1@52.87,13.184
  SIG2 w0.203: v1(34.7,35.52) 36.335,33.885 40.208,33.885 42.088,32.005 42.088,21.896 50.267,13.717 52.121,13.717 v4(52.166,13.672)
LPSPI1_SDO: IC1.113 R13.1 | length 44.1
  SIG1 w0.203: v1(34.375,36.641) IC1.113@34.375,37.02 ; v4(55.55,7.063) R13.1@55.55,8.041
  SIG2 w0.203: v1(34.375,36.641) 34.36,36.625 34.36,36.082 34.09,35.812 34.09,35.348 33.688,34.946 33.688,34.304 34.569,33.423 35.219,33.423 35.9,32.742 39.843,32.742 41.021,31.564 41.021,21.454 50.174,12.301 52.191,12.301 55.55,8.942 v4(55.55,7.063)
LPUART6_RX: IC1.145 IC6.48 J1.10 | length 43.2
  SIG1 w0.203: v8(12.557,25.013) 12.587,25.043 IC6.48@12.589,25.956 IC6.48@12.589,25.956 ; v1(27.91,29.764) 27.924,29.75 IC1.145@28.28,29.75
  SIG2 w0.203: J1.10@8.839,5.716 7.363,7.193 7.363,9.62 11.709,13.966 11.709,16.969 12.598,17.858 12.604,17.858 12.644,17.898 12.644,18.259 13.36,18.975 13.36,20.413 13.792,20.845 13.792,23.678 12.683,24.787 12.683,24.819 12.557,24.945 v8(12.557,25.013) ; v8@12.507,24.963 12.415,25.055 12.415,25.776 13.945,27.306 18.791,27.306 19.895,28.411 19.895,28.42 20.252,28.777 20.757,28.777 20.767,28.768 22.695,28.768 23.42,28.043 26.503,28.043 26.826,28.367 26.833,28.367 27.91,29.444 v1(27.91,29.764)
LPUART6_TX: IC1.143 IC6.47 J1.8 | length 45.4
  SIG1 w0.203: IC6.47@12.989,25.956 IC6.47@12.989,25.956 12.99,25.406 13.141,25.255 13.141,25.244 13.268,25.117 v8(13.268,25.049) ; IC1.143@28.28,30.4 28.725,30.4 v1(28.727,30.398)
  SIG2 w0.203: J1.8@11.379,5.716 10.214,6.881 8.63,6.881 7.719,7.792 7.719,9.473 12.065,13.819 12.065,16.816 13,17.751 13,18.076 13.716,18.792 13.716,20.265 14.165,20.714 14.165,24.131 v8@13.258,25.039 ; v8(13.268,25.049) 13.246,25.07 13.246,26.105 14.092,26.951 19.913,26.951 20.266,27.304 21.28,27.304 21.379,27.205 24.631,27.205 25.063,27.637 25.526,27.637 25.958,27.205 26.167,27.205 26.973,28.011 26.981,28.011 28.321,29.352 28.321,29.386 28.727,29.792 v1(28.727,30.398)
MPS_TLF35584_PTD5: IC1.53 IC2.22 R18.2 | length 35.9
  SIG1 w0.152: IC2.22@61.557,11.454 61.557,11.104 61.678,10.983 61.678,10.909 62.087,10.5 62.971,10.5 63.754,9.717 R18.2@63.779,9.717
  SIG1 w0.203: IC1.53@43.72,23.9 v1(44.099,23.9)
  SIG2 w0.203: v1(44.099,23.9) 44.331,23.668 45.3,23.668 45.662,24.03 46.555,24.03 46.936,24.411 52.927,24.411 54.157,23.182 54.157,19.444 53.088,18.375 53.088,15.229 56.007,12.31 56.067,12.251 57.441,10.876 62.633,10.876 v2(63.805,9.704)
NetC5_1: C5.1 IC1.16 R9.2 | length 13.1
  SIG1 w0.305: R9.2@26.403,14.632 26.422,14.651 26.422,15.845 C5.1@26.441,15.864 26.429,15.877 26.429,17.083 v4(26.416,17.096) ; IC1.16@34.061,20.628 34.061,20.846 v1(34.071,20.856)
  PWR w0.305: v4(26.416,17.096) 26.416,18.396 29.358,21.337 33.548,21.337 34.029,20.856 v1(34.071,20.856)
NetC6_1: C6.1 C9.2 D3.1 IC2.2 IC2.44 IC2.45 | length 11.1
  SIG1 w0.305: v7@54.453,17.104 IC2.2@56.407,17.104
  SIG1 w0.762: v7(54.334,17.223) 54.334,17.099 54.471,16.961 54.471,15.987 C9.2@54.505,15.953
  PWR w1.524: v7(50.698,11.177) 50.698,14.073 53.848,17.223 v7(54.334,17.223)
NetC7_1: C7.1 C8.2 D1.1 D2.1 L2.1 | length 41.7
  SIG1 w1.016: D2.1@54.018,5.158 v7(54.018,7.52)
  SIG1 w1.524: C7.1@53.772,37.339 53.772,36.409 53.81,36.371 54.74,36.371 58.058,33.054 58.058,32.759 58.105,32.712 v7(60.046,32.712) ; D1.1@62.324,36.298 62.649,36.298 C8.2@63.938,35.009
  PWR w1.524: v7(54.018,7.52) 54.018,7.578 55.625,9.185 55.625,15.825 56.388,16.588 56.388,18.213 55.651,18.95 55.651,24.792 60.046,29.186 v7(60.046,32.712)
NetC12_2: C12.2 IC2.5 | length 2.4
  SIG1 w0.203: C12.2@54.505,14.556 54.505,14.611 55.498,15.604 IC2.5@56.407,15.604
NetC15_1: C15.1 R11.2 Y1.1 | length 6.3
  SIG1 w0.203: C15.1@36.83,12.676 36.83,12.731 36.38,13.182 36.312,13.182 36.163,13.331 36.163,14.815 36.231,14.883 36.231,14.95 37.017,15.736 37.217,15.736 38.341,14.612 38.615,14.612 R11.2@38.964,14.264
NetC46_1: C46.1 R33.2 Y2.1 | length 6.3
  SIG1 w0.203: R33.2@10.693,29.554 10.718,29.554 11.067,29.206 11.067,29.049 12.186,27.93 12.386,27.93 13.172,28.715 13.172,28.782 13.24,28.85 13.24,30.343 12.496,31.087 C46.1@12.496,31.142
NetD1_2: D1.2 F1.1
NetD3_2: D3.2 D4.2 L2.2 Q1.5 Q1.6 Q1.7 Q1.8
NetIC2_12: IC2.12 R12.2 | length 2.4
  SIG1 w0.203: R12.2@54.47,13.184 54.47,13.159 55.526,12.104 IC2.12@56.407,12.104
NetIC2_13: IC2.13 R13.2 | length 2.4
  SIG1 w0.152: R13.2@55.55,9.717 55.924,10.091 56.044,10.091 57.057,11.104 IC2.13@57.057,11.454
NetIC2_14: IC2.14 R15.2 | length 1.9
  SIG1 w0.152: R15.2@56.966,9.788 56.966,10.39 57.508,10.932 57.508,11.405 IC2.14@57.557,11.454
NetIC2_15: IC2.15 R16.2 | length 1.9
  SIG1 w0.152: IC2.15@58.057,11.454 58.057,9.877 R16.2@58.293,9.641
NetIC2_16: IC2.16 R17.2 | length 2.2
  SIG1 w0.152: IC2.16@58.557,11.454 58.606,11.405 58.606,10.751 59.589,9.768 R17.2@59.64,9.768
  SIG1 w0.203: R17.2@59.64,9.768 R17.2@59.665,9.768
NetIC2_17: IC2.17 R19.2 | length 3
  SIG1 w0.152: IC2.17@59.057,11.454 59.106,11.405 59.106,10.952 59.617,10.441 60.287,10.441 61.011,9.717 R19.2@61.011,9.641
  SIG1 w0.203: R19.2@61.011,9.641 R19.2@61.036,9.641
NetIC2_18: IC2.18 R20.2 | length 3.9
  SIG1 w0.152: IC2.18@59.557,11.454 59.606,11.405 59.606,10.963 59.823,10.746 61.256,10.746 61.911,10.091 62.009,10.091 R20.2@62.383,9.717
  SIG1 w0.203: R20.2@62.383,9.717 62.383,9.641 R20.2@62.408,9.641
NetIC2_25: IC2.25 R14.1 | length 2
  SIG1 w0.203: IC2.25@63.207,12.104 64.415,12.104 64.986,11.533 R14.1@64.986,11.508
NetIC2_34: IC2.34 IC2.35 IC2.36 IC2.37 IC2.38 R6.1
NetIC2_42: IC2.42 IC2.43 L1.1 | length 9
  SIG1 w0.635: 59.817,17.985 59.817,18.778 60.295,19.256 64.292,19.256 65.579,20.543 L1.1@65.579,22.303
NetIC2_46: IC2.46 Q1.4 | length 11.5
  SIG1 w0.203: v2(57.915,19.266) 57.915,19.193 58.057,19.051 IC2.46@58.057,18.254
  SIG1 w0.305: v4(62.336,26.098) 62.394,26.04 62.394,25.455 62.468,25.381 62.468,25.276 62.486,25.259 Q1.4@62.766,25.259
  SIG2 w0.203: v2(57.915,19.266) 58.979,20.329 58.979,23.674 61.393,26.089 62.326,26.089 v4(62.336,26.098)
NetIC2_47: IC2.47 Q1.1 Q1.2 Q1.3 R8.2 | length 11
  SIG1 w0.203: v2(57.125,19.432) 57.183,19.374 57.183,19.087 57.436,18.834 57.436,18.725 57.557,18.604 IC2.47@57.557,18.254
  SIG1 w0.508: v4(60.147,20.525) 60.147,21.566 60.63,22.049 62.23,22.049 62.991,22.809 Q1.3@62.991,24.609
  PWR w0.203: v2(57.125,19.432) 58.217,20.525 v4(60.147,20.525)
NetJ3_2: J3.2 pad.5 R38.1 R40.2 | length 16.8
  SIG1 w0.203: J3.2@3.44,32.091 J3.2@3.505,32.157
  SIG1 w0.508: R40.2@3.422,30.31 3.44,30.328 J3.2@3.44,32.091 ; pad.5@5.664,30.253 12.54,37.129 ccw(c10.744,38.925) 13.284,38.925 R38.1@13.284,42.078
NetL4_2: L4.2 R39.2 R40.1 | length 2.3
  SIG1 w0.203: R40.1@4.553,29.078 R40.1@4.553,29.179
  SIG1 w0.508: R40.1@4.553,29.078 4.604,29.078 6.115,27.567 R39.2@6.115,27.516
NetLED1_2: LED1.2 R21.1 | length 2.3
  SIG1 w0.203: R21.1@28.778,44.937 28.803,44.937 29.291,45.425 30.017,45.425 LED1.2@30.454,44.987 ; LED1.2@30.267,44.875 LED1.2@30.454,44.687
NetLED2_2: LED2.2 R23.1 | length 2.1
  SIG1 w0.203: R23.1@33.909,44.938 33.934,44.938 34.282,45.287 34.282,45.312 34.446,45.475 35.125,45.475 35.512,45.088 LED2.2@35.611,45.088
NetLED3_2: LED3.2 R25.1 | length 2.6
  SIG1 w0.203: LED3.2@42.088,13.985 42.386,14.283 42.386,14.511 43.765,15.889 R25.1@43.79,15.889
NetLED4_2: LED4.2 R26.1 | length 1.6
  SIG1 w0.203: LED4.2@57.353,6.033 58.903,6.033 R26.1@58.928,6.008
NetLED5_2: LED5.2 R28.1 | length 1.6
  SIG1 w0.203: LED5.2@60.994,5.957 62.483,5.957 R28.1@62.56,6.034
NetR22_1: R22.1 SW2.2 | length 4.1
  SIG1 w0.203: R22.1@49.365,15.419 49.656,15.71 49.656,16.078 51.562,17.985 SW2.2@52.189,17.985
NetR24_1: R24.1 SW3.2 | length 3.3
  SIG1 w0.203: R24.1@47.904,33.542 47.929,33.542 48.278,33.891 48.278,33.916 49.332,34.969 SW3.2@50.622,34.969
NetR38_2: R38.2 RF1.1 | length 2.6
  SIG1 w0.508: R38.2@13.284,43.678 RF1.1@13.284,46.255
PTA0: BTB1.21 IC1.137 | length 22.8
  SIG1 w0.203: v1(28.083,32.352) 28.143,32.352 28.145,32.35 IC1.137@28.28,32.35
  SIG3 w0.152: BTB1.21@8.16,28.4 10.775,28.4 12.755,30.38 20.493,30.38 23.44,33.326 25.738,33.326 26.957,32.107 27.399,32.107 27.644,32.352 v1(28.083,32.352)
PTA1: BTB1.23 IC1.135 | length 22.9
  SIG1 w0.203: IC1.135@28.28,33 28.282,33.002 v1(28.626,33.002)
  SIG3 w0.152: BTB1.23@8.16,30 11.513,30 12.502,30.989 20.241,30.989 23.187,33.936 26.018,33.936 26.78,33.174 27.474,33.174 27.522,33.222 27.649,33.222 27.868,33.002 v1(28.626,33.002)
PTA2: BTB1.37 IC1.124 | length 35.6
  SIG1 w0.203: IC1.124@30.8,35.52 30.8,35.856 30.802,35.858 v1(30.802,35.892)
  SIG3 w0.152: BTB1.37@3.84,30.8 4.34,30.8 4.661,31.121 4.685,31.121 6.038,32.475 6.038,36.279 7.313,37.554 7.42,37.554 7.485,37.619 8.36,37.619 8.425,37.554 8.533,37.554 9.943,36.144 21.326,36.144 22.852,37.67 26.211,37.67 27.252,38.711 28.018,38.711 29.005,37.723 29.53,37.723 30.48,36.773 30.48,36.214 v1(30.802,35.892)
PTA3: BTB1.36 IC1.123 | length 35.5
  SIG1 w0.152: v1(30.351,38.33) 30.363,38.33 31.125,37.568 IC1.123@31.125,37.02
  SIG3 w0.152: BTB1.36@3.84,31.6 4.34,31.6 4.661,31.921 4.685,31.921 5.733,32.97 5.733,36.405 7.186,37.859 7.294,37.859 7.359,37.924 8.487,37.924 8.552,37.859 8.659,37.859 10.069,36.449 21.2,36.449 22.726,37.974 25.148,37.974 27.081,39.907 28.705,39.907 30.282,38.33 v1(30.351,38.33)
PTA12: BTB1.5 IC1.159 | length 27.1
  SIG1 w0.203: IC1.159@28.28,25.2 28.85,25.2 v1(28.852,25.198)
  SIG3 w0.152: BTB1.5@8.16,15.6 8.334,15.774 9.932,15.774 10.617,15.089 17.018,15.089 23.19,21.261 23.19,23.37 24.708,24.888 25.567,24.888 25.629,24.826 26.071,24.826 26.133,24.888 27.585,24.888 27.895,25.198 v1(28.852,25.198)
PTA13: BTB1.9 IC1.155 | length 24.9
  SIG1 w0.203: IC1.155@28.28,26.5 28.547,26.5 v1(28.549,26.498)
  SIG3 w0.152: BTB1.9@8.16,18.8 9.985,18.8 10.654,19.469 15.731,19.469 18.364,22.102 18.364,23.447 19.734,24.817 21.269,24.817 22.997,26.544 25.784,26.544 26.001,26.761 26.711,26.761 26.874,26.597 27.741,26.597 27.84,26.498 v1(28.549,26.498)
PTA14: BTB1.12 IC1.152 | length 23.8
  SIG1 w0.203: IC1.152@26.78,27.475 27.182,27.475 v1(27.205,27.452)
  SIG3 w0.152: BTB1.12@8.16,21.2 8.334,21.026 9.888,21.026 10.389,20.525 14.96,20.525 15.493,20.525 17.45,22.481 17.45,23.015 17.45,23.396 17.45,23.826 19.356,25.732 20.891,25.732 22.923,27.764 24.041,27.764 24.193,27.916 25.642,27.916 26.085,27.473 27.184,27.473 v1(27.205,27.452)
PTA17: BTB1.46 IC1.109 | length 60.8
  SIG1 w0.203: v1(35.675,36.581) IC1.109@35.675,37.02
  SIG3 w0.152: BTB1.46@3.84,23.6 3.34,23.6 3.019,23.921 2.995,23.921 0.914,26.002 0.914,38.986 3.662,41.734 9.701,41.734 11.735,39.7 20.141,39.7 21.463,41.022 23.495,41.022 26.523,44.05 31.264,44.05 35.675,39.639 v1(35.675,36.581)
PTA18: BTB1.2 IC1.1 | length 23.5
  SIG1 w0.152: v1(28.27,18.8) 28.273,18.797 29.116,18.797 29.175,18.738 IC1.1@29.175,18.58
  SIG3 w0.152: BTB1.2@8.16,13.2 9.82,13.2 10.794,14.175 21.26,14.175 25.578,18.493 27.963,18.493 v1(28.27,18.8)
PTA19: BTB1.1 IC1.2 | length 25
  SIG1 w0.152: v1(29.439,19.94) 29.439,20.019 IC1.2@29.5,20.08
  SIG3 w0.152: BTB1.1@8.16,12.4 9.554,12.4 11.024,13.87 21.386,13.87 25.704,18.188 28.412,18.188 28.804,18.579 28.804,18.785 29.439,19.42 v1(29.439,19.94)
PTA20: BTB1.54 IC1.3 | length 32.8
  SIG1 w0.152: v1(28.042,17.629) 28.064,17.651 29.456,17.651 29.825,18.02 IC1.3@29.825,18.58
  SIG3 w0.152: BTB1.54@3.84,17.2 4.34,17.2 4.661,16.879 4.685,16.879 6.731,14.832 6.731,12.506 7.315,11.921 12.707,11.921 13.437,12.651 20.701,12.651 25.908,17.858 27.744,17.858 27.973,17.629 v1(28.042,17.629)
PTA21: BTB1.57 IC1.6 | length 36.7
  SIG1 w0.203: v1(30.785,20.55) 30.785,20.095 IC1.6@30.8,20.08
  SIG3 w0.152: BTB1.57@3.84,14.8 3.912,14.728 4.729,14.728 5.629,13.829 5.629,12.315 7.376,10.568 24.587,10.568 28.397,14.378 28.397,15.984 28.845,16.432 29.218,16.432 29.488,16.702 29.523,16.702 29.762,16.941 29.762,17.383 29.767,17.387 29.767,17.922 30.594,18.749 30.594,19.39 30.785,19.581 v1(30.785,20.55)
PTA24: BTB1.49 IC1.14 | length 59.7
  SIG1 w0.203: v1(33.398,20.499) 33.398,20.082 IC1.14@33.4,20.08
  SIG3 w0.152: BTB1.49@3.84,21.2 3.34,21.2 3.019,20.879 2.995,20.879 1.279,19.162 1.279,10.004 4.743,6.54 5.052,6.54 6.525,5.067 6.525,4.758 8.388,2.894 22.641,2.894 22.704,2.894 22.753,2.943 30.524,11.343 30.565,11.387 30.565,13.318 33.579,16.332 33.579,17.669 33.16,18.088 33.16,18.576 33.263,18.679 33.263,19.387 33.398,19.522 v1(33.398,20.499)
PTA25: BTB1.48 IC1.15 | length 59.2
  SIG1 w0.203: v1(33.694,18.355) 33.725,18.387 IC1.15@33.725,18.58
  SIG3 w0.152: BTB1.48@3.84,22 3.34,22 3.019,21.679 2.995,21.679 0.974,19.657 0.974,9.877 4.616,6.235 4.926,6.235 6.22,4.941 6.22,4.631 8.262,2.59 22.78,2.59 22.843,2.59 22.892,2.639 30.829,11.217 30.869,11.261 30.869,13.191 33.963,16.285 33.963,17.716 33.742,17.937 33.742,18.307 v1(33.694,18.355)
PTA27: BTB1.47 IC1.28 | length 67.6
  SIG1 w0.203: v1(37.95,19.641) IC1.28@37.95,20.08
  SIG3 w0.152: BTB1.47@3.84,22.8 2.793,22.8 0.669,20.676 0.669,9.751 4.49,5.93 4.8,5.93 5.915,4.815 5.915,4.505 8.136,2.285 22.977,2.285 23.106,2.414 31.174,11.135 31.253,11.299 31.267,11.33 31.267,13.158 35.936,17.827 35.936,20.474 36.401,20.939 37.434,20.939 37.95,20.424 v1(37.95,19.641)
PTA28: BTB2.9 IC1.30 | length 53.6
  SIG1 w0.203: IC1.30@38.6,20.08 38.608,20.072 v1(38.608,19.94)
  SIG3 w0.152: v1(38.608,19.94) 38.596,19.928 38.596,18.015 38.783,17.828 38.783,15.953 51.317,3.419 59.322,3.419 59.409,3.507 63.393,3.507 70.434,10.548 70.434,17.248 69.056,18.626 68.334,18.626 BTB2.9@68.16,18.8
PTB0: BTB2.19 IC1.95 | length 48.3
  SIG1 w0.152: IC1.95@40.225,37.02 40.225,37.568 40.935,38.277 v1(40.945,38.277)
  SIG3 w0.152: v1(40.945,38.277) 40.945,38.329 41.224,38.609 41.224,40.488 44.958,44.222 62.513,44.222 64.241,42.494 64.241,42.443 66.443,40.241 67.103,40.241 69.494,37.85 69.494,27.611 69.005,27.121 68.981,27.121 68.66,26.8 BTB2.19@68.16,26.8
PTB1: BTB2.27 IC1.94 | length 41.2
  SIG1 w0.203: v1(40.548,35.866) 40.548,35.522 IC1.94@40.55,35.52
  SIG3 w0.152: v1(40.548,35.866) 41.529,36.847 41.529,40.362 45.084,43.917 62.387,43.917 63.936,42.367 63.936,42.317 64.61,41.643 64.61,40.73 66.074,39.265 66.371,39.265 67.158,38.478 67.158,33.679 67.315,33.521 67.339,33.521 67.66,33.2 BTB2.27@68.16,33.2
PTB2: BTB2.40 IC1.79 | length 24
  SIG1 w0.203: v1(43.485,32.352) 43.718,32.352 IC1.79@43.72,32.35
  SIG3 w0.152: v1(43.485,32.352) 44.339,32.352 44.959,32.972 46.807,32.972 47.322,33.487 47.322,33.598 47.837,34.113 48.091,34.368 55.704,34.368 61.177,28.895 62.102,28.895 62.597,28.4 BTB2.40@63.84,28.4
PTB3: BTB2.43 IC1.74 | length 23.2
  SIG1 w0.203: v1(44.856,30.735) 44.867,30.725 IC1.74@45.22,30.725
  SIG3 w0.152: v1(44.856,30.735) 44.879,30.735 45.173,31.029 45.785,31.029 46.304,31.549 46.304,31.993 46.673,32.362 47.059,32.362 47.363,32.666 53.392,32.666 58.726,27.332 62.001,27.332 62.861,26.471 62.861,26.455 62.995,26.321 63.019,26.321 63.34,26 BTB2.43@63.84,26
PTB4: BTB2.5 IC1.48 | length 30
  SIG1 w0.152: IC1.48@45.22,22.275 45.815,22.275 45.942,22.148 46.031,22.148 46.353,21.826 v1(46.353,21.795)
  SIG3 w0.152: v1(46.353,21.795) 46.4,21.842 46.969,21.842 55.578,13.233 55.578,12.826 57.024,11.381 64.144,11.381 66.065,13.302 66.065,14.225 67.291,15.451 68.011,15.451 BTB2.5@68.16,15.6
PTB5: BTB2.4 IC1.47 | length 31.1
  SIG1 w0.203: v1(43.703,21.948) 43.718,21.948 IC1.47@43.72,21.95
  SIG3 w0.152: v1(43.703,21.948) 45.354,21.948 46.041,21.261 46.574,21.261 46.662,21.349 47.031,21.349 55.273,13.107 55.273,12.7 56.898,11.076 64.27,11.076 66.37,13.176 66.37,13.717 67.297,14.644 68.004,14.644 BTB2.4@68.16,14.8
PTB8: BTB1.25 IC1.133 | length 22.5
  SIG1 w0.203: v1(28.247,33.652) 28.249,33.65 IC1.133@28.28,33.65
  SIG3 w0.152: BTB1.25@8.16,31.6 9.79,31.6 9.791,31.599 19.988,31.599 22.935,34.545 24.359,34.545 24.817,35.003 25.921,35.003 26.239,34.685 26.239,34.146 26.906,33.479 27.348,33.479 27.522,33.652 v1(28.247,33.652)
PTB9: BTB1.28 IC1.130 | length 22.6
  SIG1 w0.152: IC1.130@26.78,34.625 26.796,34.641 26.796,36.256 v1(26.81,36.269)
  SIG3 w0.152: BTB1.28@8.16,34 9.232,34 10.719,32.513 19.42,32.513 23.357,36.45 26.305,36.45 26.438,36.318 26.761,36.318 v1(26.81,36.269)
PTB10: BTB1.29 IC1.129 | length 21.9
  SIG1 w0.152: v1(28.041,36.805) 28.11,36.805 28.288,36.984 29.116,36.984 29.152,37.02 IC1.129@29.175,37.02
  SIG3 w0.152: BTB1.29@8.16,34.8 21.275,34.8 23.231,36.755 26.59,36.755 26.64,36.805 v1(28.041,36.805)
PTB11: BTB1.39 IC1.126 | length 36.1
  SIG1 w0.203: v1(30.005,34.642) 30.044,34.681 30.044,34.834 30.15,34.939 IC1.126@30.15,35.52
  SIG3 w0.152: BTB1.39@3.84,29.2 4.34,29.2 4.661,29.521 4.685,29.521 6.647,31.484 6.647,36.026 7.565,36.944 7.673,36.944 7.738,37.009 8.108,37.009 8.173,36.944 8.281,36.944 9.69,35.535 21.579,35.535 23.104,37.06 26.464,37.06 26.798,37.395 28.24,37.395 30.049,35.586 30.049,34.685 v1(30.005,34.642)
PTB12: BTB1.42 IC1.117 | length 50.2
  SIG3 w0.152: BTB1.42@3.84,26.8 3.34,26.8 3.019,27.121 2.995,27.121 2.159,27.958 2.159,38.506 4.167,40.514 8.563,40.514 9.39,39.687 9.417,39.687 10.826,38.278 20.443,38.278 21.968,39.803 24.333,39.803 26.34,41.81 31.217,41.81 33.096,39.93 33.096,39.105 33.045,39.054 33.045,37.805 33.079,37.771 33.079,37.444 v1(33.128,37.395)